# Altium PCB H1FR7x.PcbDoc (part 2 of 2)
Units mil, origin at the board's own origin, x right, y up, seen from the top; angles counter-clockwise.
Board outline 2362.2 x 1363.78 mil, 2 copper layers (Top Layer, Bottom Layer); 48 components, 36 nets, 147 pads, 39 vias.
Unrouted connection lines stored in the file: 28.
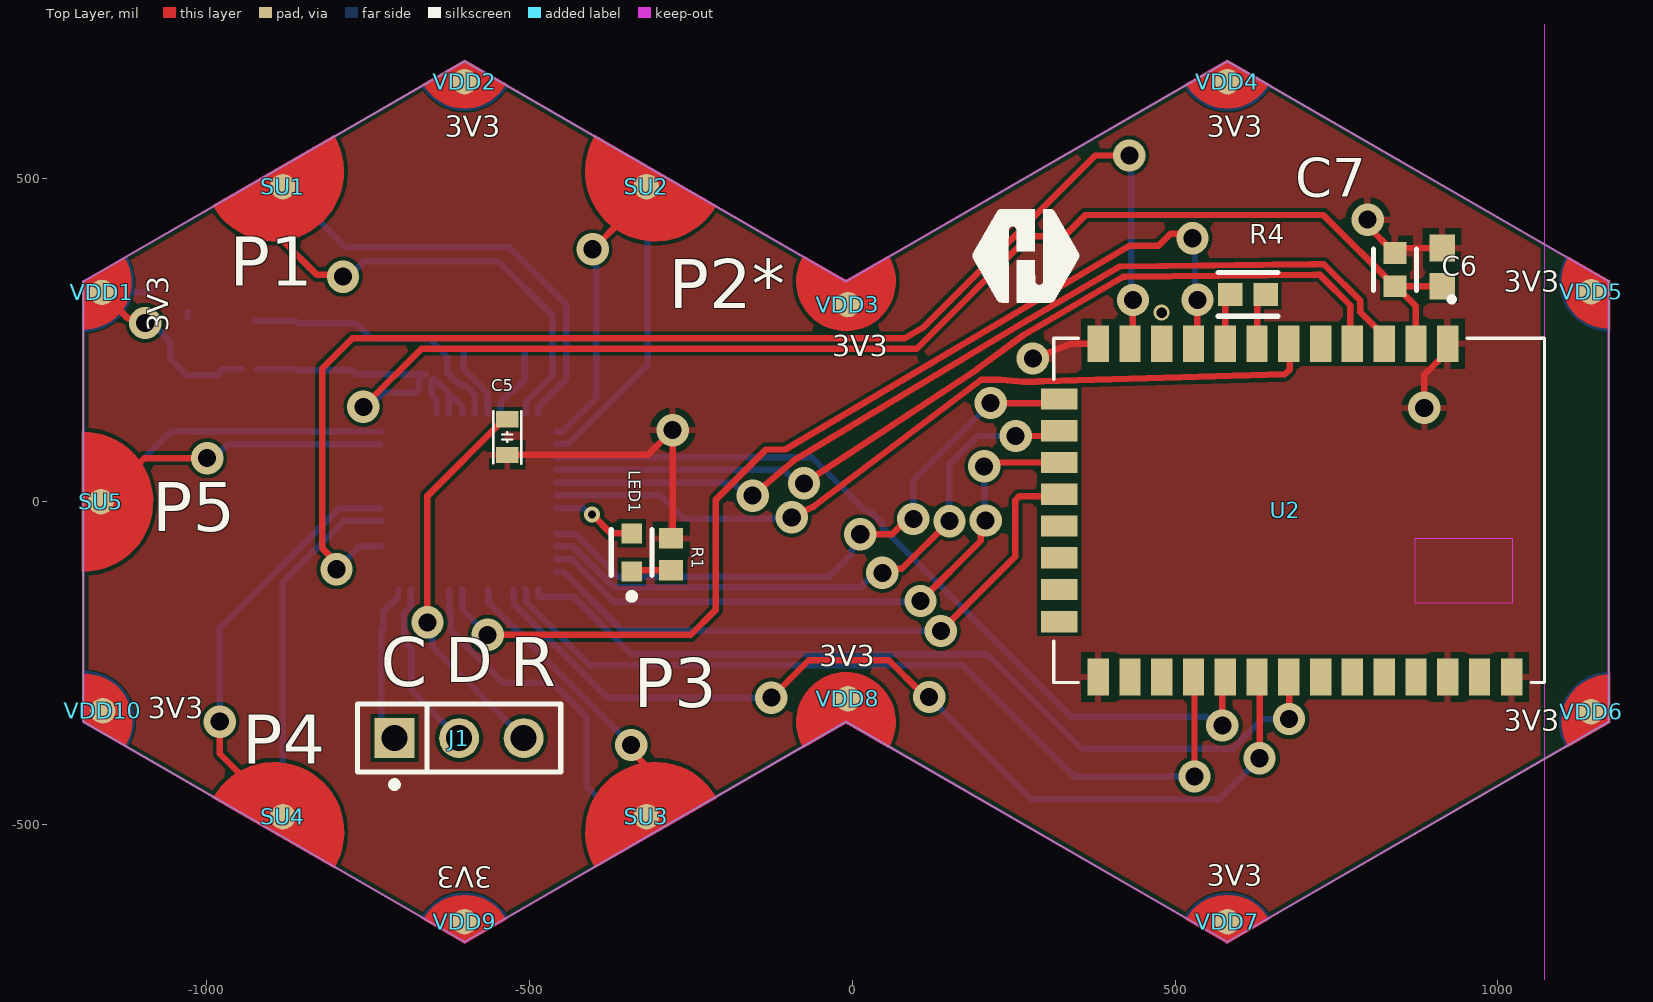
[diagram p0: Top Layer view]

## Part data (continued)
VDD8: library part HEXABIT_POWER_PORT_U_300L
X1: "Ceramic Resonator 8MHz ±0.5% (Tol) ±0.2% (Stability) 10pF 40Ohm 3-Pin CSMD T/R", Case Code (Imperial)=1206, Case Code (Metric)=3216, Frequency=8MHz, Frequency Stability=0.2%, Frequency Tolerance=0.5%, Load Capacitance=10pF, Manufacturer=Murata, Max Operating Temperature=125°C, Min Operating Temperature=-40°C, Package Quantity=1, Case/Package=1206, Category=Capacitors, Contact Plating=Gold, Height=0.031inch, Impedance=40R, Length=3.2mm, Library=Hexabitz, Manufacturer Part Number=CSTCE8M00G52Z-R0, Mounting Technology="Surface Mount", Packaging="Tape and Reel", Pins=3, RoHS Compliant=Yes, Self Resonant Frequency=8MHz, Series=CERALOCK®, Termination=SMD/SMT, Tolerance=0.5%, Width=1.3mm

## Via types
v1: diameter 50, hole 28, Top Layer to Bottom Layer, 37 vias
v2: diameter 25, hole 16, Top Layer to Bottom Layer, 1 vias
v3: diameter 25, hole 12, Top Layer to Bottom Layer, 1 vias

## Nets (pads, with @x,y where several pads share a name; then routed paths per layer and width w, separated by ;. In a path a pad name is that pad's centre, name@x,y a point inside that pad or via, vN(x,y) a via of type N, cw(c..) or ccw(c..) an arc to the next point about the centre after c; other vN are vias at no path point)
CLK_BOOT: J1.1 R3.1 U1.36 | length 247.2
  Bottom Layer w10: R3.1@-729.39,-202.95 -729.39,-345.34 J1.1 ; R3.1 -725.84,-196.45 -725.84,-170.23 -703.17,-147.56 -703.17,-136.73 U1.36
DATA: J1.2 U1.35 | length 270.2
  Bottom Layer w10: U1.35 -683.49,-136.73 -683.49,-161.73 -693.65,-171.9 -693.65,-216.07 -682.58,-227.14 -682.58,-292.15 J1.2
GND: C5.1 C6.1 C7.2 D1.1 GND1.Pwr_D GND2.Pwr_D GND3.Pwr_D GND4.Pwr_D GND5.Pwr_D GND6.Pwr_D GND7.Pwr_D GND8.Pwr_D GND9.Pwr_D GND10.Pwr_D R1.1 R2.1 R3.2 U1.49 U2.1 U2.10 U2.12 U2.21 U2.32 U2.34 X1.P$2 | length 894.4
  Top Layer w10: C5.1 -316.17,72.44 v1(-277.89,110.72) -277.89,-54.51 R1.1 ; v1(279.93,221.73) 339.62,244.58 U2.12 ; v1(798.29,436.75) 798.29,426.46 839.75,385.01 C7.2 848.51,392.78 C6.1 ; v1(885.99,145.29) 885.99,196.32 922.26,232.58 U2.1 ; U2.32 U2.32@923.8,-269.88
  Bottom Layer w10: GND1.Pwr_D -1090.43,324.01 -1085.58,328.86 ; D1.1 D1.1@-1029,293.15
  other v2: 479.35,292.76
NetLED1_1: LED1.1 R1.2 | length 62.1
  Top Layer w10: LED1.1 -339.22,-106.07 R1.2
NetLED1_2: LED1.2 U1.19 | length 133.1
  Top Layer w10: v3(-402.78,-19.7) -373.28,-49.2 LED1.2
  Bottom Layer w10: U1.19 -416.69,-9.84 -406.84,-19.7 v3(-402.78,-19.7)
NetR4_1: R4.1 U2.7 | length 72.6
  Top Layer w10: U2.7 627.06,314.33 R4.1@629.08,316.35
NetR4_2: R4.2 U2.8 | length 73.4
  Top Layer w10: R4.2@573.81,316.35 577.86,312.3 U2.8
NetU1_8: U1.8 X1.P$3 | length 114.4
  Bottom Layer w10: X1.P$3 -601.24,205.47 -564.47,168.71 U1.8
NetU1_9: U1.9 X1.P$1 | length 117.3
  Bottom Layer w10: U1.9 -543.88,136.73 -543.88,155.24 -526.37,172.75 -522.4,172.75 -506.76,188.39 X1.P$1
NetU1_15: U1.15 U2.25 | length 1284.4
  Top Layer w10: v1(573.3,-346.55) 573.3,-275.97 U2.25
  Bottom Layer w10: U1.15 -62.32,68.9 21.01,-14.44 27.47,-14.44 48.55,-35.53 48.55,-41.98 339.82,-333.25 549.18,-333.25 562.48,-346.55 v1(573.3,-346.55)
NetU1_16: U1.16 U2.4 | length 1413.6
  Top Layer w10: v1(-74.43,28.39) 192.86,204.54 265.02,257.73 420,348.12 422.83,348.16 715.66,351.63 723.94,351.63 726.87,348.7 771.2,304.37 771.2,248.04 U2.4
  Bottom Layer w10: U1.16 -106.08,49.21 -85.25,28.39 v1(-74.43,28.39)
NetU1_17: U1.17 U2.3 | length 1461.6
  Top Layer w10: v1(-153.92,9.35) -89.98,63.84 259.76,273.73 413.3,364.05 416.11,364.15 709.03,367.63 730.57,367.63 733.5,364.7 787.2,311 787.2,293.24 823.86,256.58 U2.3
  Bottom Layer w10: U1.17 -184.92,29.53 -164.75,9.35 v1(-153.92,9.35)
NetU1_18: U1.18 U2.6 | length 1266
  Top Layer w10: v1(-93.43,-24.29) -59.52,-7.61 197.04,186.7 199.64,188.67 229.46,188.67 265.02,185.73 286.85,185.73 287.7,186.58 295.69,186.58 670.16,197.09 673.01,199.94 677.57,204.5 677.57,243.27 U2.6
  Bottom Layer w10: U1.18 -297.42,9.84 -260.93,-26.65 -95.79,-26.65 v1(-93.43,-24.29)
NetU1_21: U1.21 U2.13 | length 965.7
  Top Layer w10: v1(12.55,-50.44) 61.82,-50.44 85.35,-26.9 v1(94.85,-26.9) ; v1(214.55,152.67) 314.35,152.67 U2.13
  Bottom Layer w10: U1.21 -457.27,-50.12 -428.22,-50.12 -362.09,-116.25 -36.36,-116.25 -0.72,-80.62 -0.72,-74.54 12.55,-61.26 v1(12.55,-50.44) ; v1(94.85,-26.9) 94.85,32.97 v1(214.55,152.67)
NetU1_22: U1.22 U2.14 | length 957.4
  Top Layer w10: v1(46.76,-110.18) 53.06,-103.88 77.03,-103.88 v1(150.75,-30.16) ; v1(253.18,101.68) 312.55,101.68 U2.14
  Bottom Layer w10: U1.22 -432.07,-68.9 -368.72,-132.25 13.87,-132.25 35.94,-110.18 v1(46.76,-110.18) ; v1(150.75,-30.16) 150.75,58.53 193.89,101.68 v1(253.18,101.68)
NetU1_23: U1.23 U2.15 | length 961.8
  Top Layer w10: v1(105.82,-153.95) 199.09,-60.68 199.09,-36.77 v1(206.74,-29.12) ; v1(204.48,54.71) 210.45,60.68 U2.15
  Bottom Layer w10: U1.23 -457.27,-89.49 -434.11,-89.49 -368.93,-154.67 105.11,-154.67 v1(105.82,-153.95) ; v1(204.48,54.71) 204.48,-26.86 v1(206.74,-29.12)
NetU1_24: U1.24 U2.16 | length 955.8
  Top Layer w10: v1(137.41,-200.19) 252.65,-84.95 252.65,2.23 258.51,8.08 317.36,8.08 U2.16
  Bottom Layer w10: U1.24 -447.35,-108.27 -355.42,-200.19 v1(137.41,-200.19)
NetU1_25: U1.25 U2.27 | length 1355.2
  Top Layer w10: U2.27 676.6,-271.76 v1(676.6,-336.56)
  Bottom Layer w10: U1.25 -485.73,-146.65 -484.83,-147.56 -430.68,-147.56 -342.05,-236.19 209.36,-236.19 355.72,-382.55 589.09,-382.55 635.08,-336.56 v1(676.6,-336.56)
NetU1_26: U1.26 U2.24 | length 1321.2
  Top Layer w10: U2.24 530.21,-272.97 v1(530.21,-425.49)
  Bottom Layer w10: U1.26 -504.51,-136.73 -504.51,-155.24 -406.74,-253.01 170.57,-253.01 343.04,-425.49 v1(530.21,-425.49)
NetU1_27: U1.27 U2.26 | length 1506
  Top Layer w10: v1(-125.14,-303.45) -67.12,-245.44 56.79,-245.44 107.48,-296.13 108.05,-296.13 114.24,-302.33 v1(119.31,-302.33) ; U2.26 630.94,-275.3 v1(630.94,-397.36)
  Bottom Layer w10: U1.27 -524.2,-136.73 -524.2,-158.18 -378.93,-303.45 v1(-125.14,-303.45) ; v1(119.31,-302.33) 278.47,-461.49 567.4,-461.49 630.94,-397.95 v1(630.94,-397.36)
NetU1_31: U1.31 U2.9 | length 1663.1
  Top Layer w10: v1(-564.32,-206.23) -249.89,-206.23 -210.79,-167.14 -210.79,3.39 -133.42,80.77 -103.67,80.77 426.7,394.67 429.06,396.06 474.1,396.06 493.06,415.02 520.11,415.02 v1(527.2,407.93) ; U2.9 534.69,250.62 v1(534.69,312.46)
  Bottom Layer w10: U1.31 -603.84,-166.71 v1(-564.32,-206.23) ; v1(527.2,407.93) 530.95,404.19 530.95,316.2 v1(534.69,312.46)
NetU1_39: U1.39 U2.11 | length 2083.5
  Top Layer w10: v1(-798.55,-104.66) -798.55,-93.83 -820.72,-71.66 -820.72,206.03 -773.74,253.01 81.77,253.01 109.66,269.29 376.4,536.04 v1(429.3,536.04) ; U2.11 434.91,249.24 v1(434.91,312.12)
  Bottom Layer w10: v1(-798.55,-104.66) -762.79,-68.9 U1.39 ; v1(429.3,536.04) 432.1,533.23 432.1,314.93 v1(434.91,312.12)
NRST: C5.2 J1.3 U1.10 | length 609.6
  Top Layer w10: v1(-657.65,-186.81) -657.65,8.83 -538.92,127.56 C5.2
  Bottom Layer w10: v1(-657.65,-186.81) -650,-194.46 -650,-224.73 J1.3
UART1_RX: SD3.UART_D U1.32 | length 549.8
  Bottom Layer w10: U1.32 -623.53,-170.02 -621.65,-171.9 -621.65,-199.29 -600.32,-220.62 -600.32,-221.14 -579.24,-242.23 -578.71,-242.23 -540.6,-280.34 -464.75,-280.34 -410.57,-334.52 -410.57,-441.36 -390.16,-461.77 -344.53,-461.77 SD3.UART_D
UART1_TX: SU3.UART_U U1.29 | length 453.9
  Top Layer w10: v1(-342.09,-376.89) -342.09,-386.28 -318.5,-409.87 SU3.UART_U
  Bottom Layer w10: U1.29 -563.57,-136.73 -563.57,-155.41 v1(-342.09,-376.89)
UART2_RX: SD2.UART_D U1.14 | length 469.4
  Bottom Layer w10: U1.14 -457.27,89.49 -438.76,89.49 -316.73,211.51 -316.73,486.03 SD2.UART_D
UART2_TX: SU2.UART_U U1.13 | length 448.1
  Top Layer w10: v1(-401.8,390.89) -356.43,436.26 -356.43,449.87 SU2.UART_U
  Bottom Layer w10: U1.13 -447.35,108.27 -446.44,109.17 -446.44,110.42 -396.51,160.35 -396.51,385.6 v1(-401.8,390.89)
UART3_RX: SD5.UART_D U1.48 | length 478.4
  Bottom Layer w10: SD5.UART_D -1055.12,108.27 U1.48
UART3_TX: SU5.UART_U U1.47 | length 470.3
  Top Layer w10: SU5.UART_U -1096.05,67.34 v1(-998.69,67.34)
  Bottom Layer w10: v1(-998.69,67.34) -987.87,67.34 -966.62,88.58 U1.47
UART4_RX: SD1.UART_D U1.12 | length 702.3
  Bottom Layer w10: SD1.UART_D -877.95,487.8 -783.97,393.82 -530.72,393.82 -442.36,305.46 -442.36,190.02 -485.73,146.65 U1.12
UART4_TX: SU1.UART_U U1.11 | length 738.1
  Top Layer w10: SU1.UART_U -881.5,404.1 -828.46,351.06 -791.05,351.06 v1(-788.46,348.47)
  Bottom Layer w10: v1(-788.46,348.47) -779.61,348.47 -755.75,372.33 -547.81,372.33 -464.66,289.19 -464.66,195.09 -504.51,155.24 -504.51,136.73 U1.11
UART5_RX: SD4.UART_D U1.41 | length 554.2
  Bottom Layer w10: SD4.UART_D -881.5,-124.77 -786.25,-29.53 U1.41
UART5_TX: SU4.UART_U U1.42 | length 659.1
  Top Layer w10: v1(-979.13,-340.71) -979.13,-390.17 SU4.UART_U
  Bottom Layer w10: v1(-979.13,-340.71) -979.13,-195.19 -793.78,-9.84 U1.42
VDD: D1.2 FB1.1 VDD1.Pwr_U VDD2.Pwr_U VDD3.Pwr_U VDD4.Pwr_U VDD5.Pwr_U VDD6.Pwr_U VDD7.Pwr_U VDD8.Pwr_U VDD9.Pwr_U VDD10.Pwr_U | length 292.6
  Top Layer w10: VDD1.Pwr_U -1121.98,284.36 -1102.24,284.36 v1(-1094.59,276.7)
  Bottom Layer w10: v1(-1094.59,276.7) -1084.68,276.7 -1055.86,247.88 -1055.86,221.58 D1.2 -983.37,194.72 -976.56,201.54 FB1.1 -944.25,205
VDDA: C1.2 C2.1 C3.2 C4.2 C6.2 C7.1 FB1.2 U1.4 U1.5 U1.6 U2.2 | length 2493.3
  Top Layer w10: v1(-756.89,146.79) -666.67,237.01 100.01,237.01 273.66,410.67 328.22,410.67 361.48,443.93 729.64,443.93 839.75,333.82 C7.1@841.72,333.82 ; U2.2 873.06,302.48 C7.1@841.72,333.82 ; C6.2 913.6,333.82 C7.1@841.72,333.82
  Bottom Layer w10: FB1.2 -860.5,205 C4.2 C2.1 -767.57,197.07 C3.2 C1.2 -662.89,197.07 -670.49,189.47 -670.49,175.46 -676.35,169.6 -725.1,169.6 -747.91,146.79 v1(-756.89,146.79) ; C1.2@-650.71,188.18 -650.71,165.2 -644.12,158.61 -644.12,136.73 U1.4 ; C1.2@-648.25,190.64 -635.05,177.44 -634.63,177.44 -603.84,146.65 U1.6 ; -624.43,166.83 -624.43,136.73 U1.5
VSSA: C1.1 C2.2 C3.1 C4.1 R2.2 U1.7 | length 431.9
  Bottom Layer w10: R2.2 -862.5,280 C4.1 C2.2 -768,276.5 -743.69,252.19 C3.1 C1.1 -654.67,252.19 -626.78,224.29 -626.78,199.7 -606.48,179.4 -597.8,179.4 -584.16,165.76 U1.7
pads on no net: U1.1 U1.2 U1.3 U1.20 U1.28 U1.30 U1.33 U1.34 U1.37 U1.38 U1.40 U1.43 U1.44 U1.45 U1.46 U2.5 U2.17 U2.18 U2.19 U2.20 U2.22 U2.23 U2.28 U2.29 U2.30 U2.31 U2.33

## Polygon pours and split planes (outlines as drawn)
GND on Top Layer "GND_L01_P003" (solid, pour order 3): -1190.55,-340.94 -600,-681.89 -9.45,-340.94 581.1,-681.89 1171.65,-340.94 1171.65,340.94 581.1,681.89 -9.45,340.94 -600,681.89 -1190.55,340.94
no net on Bottom Layer "NONET_L02_P004" (solid, pour order 4): -1190.55,-340.94 -600,-681.89 -9.45,-340.94 581.1,-681.89 1171.65,-340.94 1171.65,340.94 581.1,681.89 -9.45,340.94 -600,681.89 -1190.55,340.94

## Keep-outs
Keep-Out Layer:
  the board outline again, w3.94

## Silkscreen, mask and mechanical layers (free items; w line width, h text height)
Top Overlay:
  drawing of 1337 lines, arcs and shapes, not listed
  text "3V3" at -631,565.01 h32
  text "3V3" at 549,565.01 h32
  text "P1" at -964,334.02 h76
  text "3V3" at 1009,325.01 h32
  text "P2*" at -283.81,299.47 h76
  text "3V3" at -1059.01,263 h32 r90
  text "3V3" at -31,225.01 h32
  text "P5" at -1084,-45.98 h76
  text "3V3" at -51,-254.99 h32
  text "D" at -630,-279.99 h70
  text "C" at -730,-285.98 h76
  text "R" at -530,-285.98 h76
  text "P3" at -338.44,-318.67 h76
  text "3V3" at -1091,-334.99 h32
  text "3V3" at 1009,-354.99 h32
  text "P4" at -944,-405.98 h76
  text "3V3" at -557,-565.01 h32 r180
  text "3V3" at 549,-594.99 h32
Bottom Overlay:
  text "GND" at -631,594.99 h32 r180
  text "GND" at 549,594.99 h32 r180
  text "P1" at -710,414.02 h76
  text "P2*" at -224,334.02 h76
  text "GND" at 1083,325.01 h32
  text "GND" at -51,254.99 h32 r180
  text "GND" at -1101.95,220.12 h32 r90
  text "H1FR7x" at 433.52,7.87 h70
  text "P5" at -984,-45.98 h76
  text "GND" at -51,-225.01 h32 r180
  text "GND" at -1017.18,-239.03 h32
  text "GND" at 1083,-354.99 h32
  text "P4" at -824,-405.98 h76
  text "P3" at -424,-505.98 h76
  text "GND" at 549,-545.01 h32 r180
  text "GND" at -651,-565.01 h32 r180
Top Solder:
  drawing of 17 lines, arcs and shapes, not listed
Bottom Solder:
  drawing of 17 lines, arcs and shapes, not listed
Dimensions:
  lines w3.94: -3.06,-340.94 -593.61,-681.89 -1184.16,-340.94 -1184.16,340.94 -593.61,681.89 -3.06,340.94

## Text inside footprints (layer, text, board x,y; h text height)
C2: Mechanical 32 "2" at -774,266.5 h25 r270; Mechanical 32 "1" at -774,193.5 h25 r270; Mechanical 33 "C40" at -781.17,313.5 h25 r270
C4: Mechanical 32 "2" at -859,213.5 h25 r90; Mechanical 32 "1" at -859,286.5 h25 r90; Mechanical 33 "C40" at -851.83,166.5 h25 r90